# EAGLE board ATTiny Fuse Reset with 12V Charge Pump (EAGLE 7.2.0)
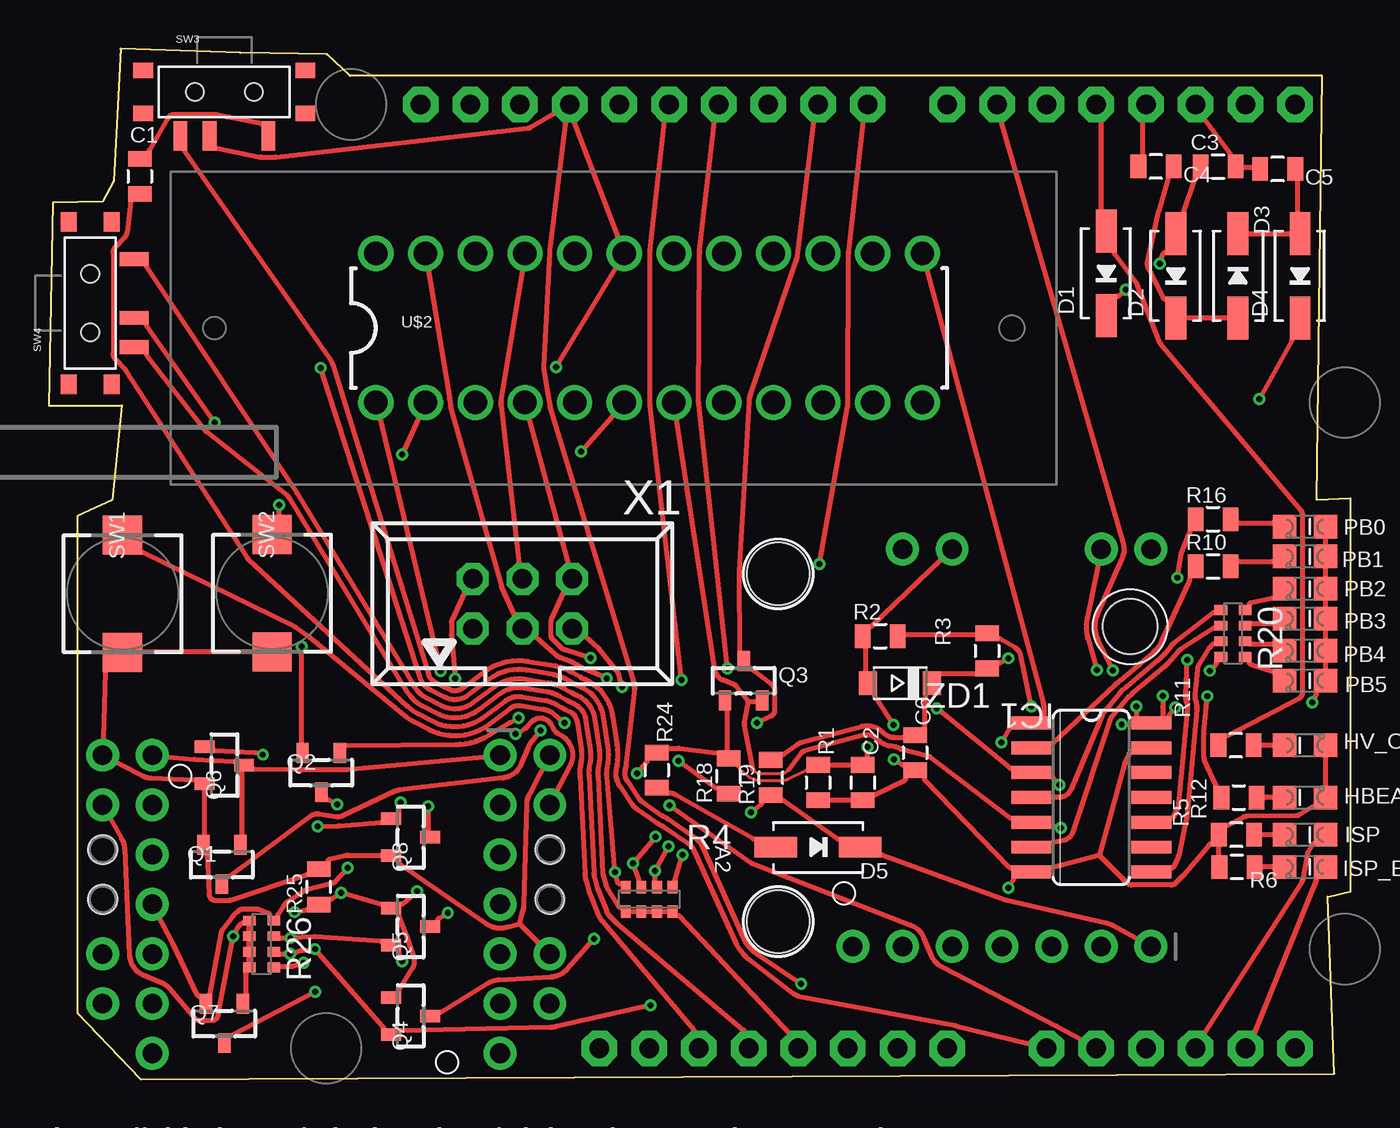
[diagram p0: board, top side]
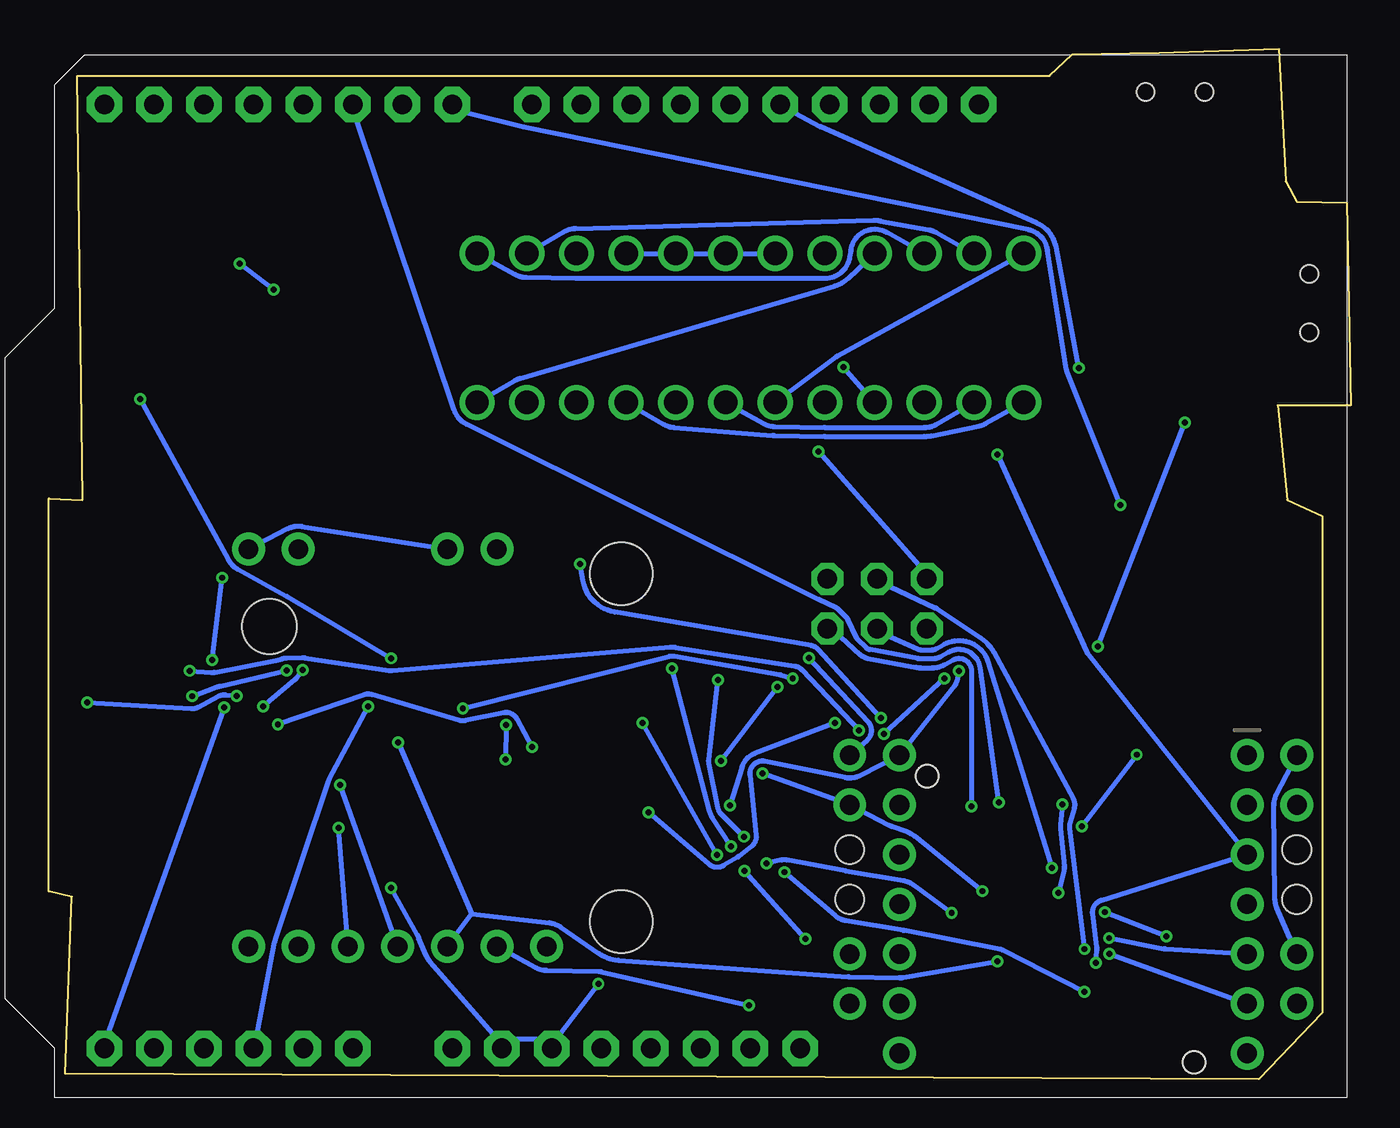
[diagram p1: board, bottom side, seen from below]

Size 66.55 x 52.67 mm. Coordinates in mm from the lower left corner, seen from the top.
Copper layers 1+16: TOP 0.035mm / dielectric 0.15mm / BOTTOM 0.035mm
Design rules "default": minimum track width 6mil, minimum drill 0.6mm, track to track 6mil, track to pad 8mil, pad to pad 8mil, via to via 8mil, smd to smd 8mil, copper to edge 12mil, drill to drill 8mil, minimum pad ring 0.1mm, minimum via ring 0.1mm, stop-mask expansion 4mil, vias tented up to drill 0mil, thermal gap 10mil
Net classes: 0 default: width 0.152 mm, clearance 0.205 mm

## Footprints (pad centres in the part's own frame; a part is rotated, then mirrored left to right if it is on the bottom)
BREAKOUT_TAMI_NOHOLES = drill 1 pad 1.676: 1.PB5 -10.16,-8.89; 2.PB4 -10.16,-6.35; 3.PB3 -10.16,-3.81; 4.PB2 -10.16,-1.27; 5.PB1 -10.16,1.27; 6.PB0 -10.16,3.81; 7.GND -10.16,6.35; 8.GND 10.16,-8.89; 9.VCC 10.16,-6.35; 10.GND 10.16,1.27; 11.BAT 10.16,3.81
BREAKOUT_ATTAMI = drill 1 pad 1.676: 1.PB5 1.27,1.27; 2.PB4 1.27,3.81; 3.PB3 1.27,6.35; 4.PB2 1.27,8.89; 5.PB1 1.27,11.43; 6.PB0 1.27,13.97; 7.GND 1.27,16.51; 8.GND 21.59,1.27; 9.VCC 21.59,3.81; 10.GND 21.59,11.43; 11.BAT 21.59,13.97 | hole 2.8: 17.628,2.337 | hole 3.2: 20.32,20.32; 2.54,20.32
0805 = smd 0.8 x 1.2: 1 -0.9,0; 2 0.9,0
SOD-323 = smd 2.184 x 1.067: AQ 2.159,0; CQ -2.159,0
LED-805 = smd 1.2 x 1.2: A 0,-1.05; C 0,1.05
SO14 = smd 0.66 x 2.032: 1 -3.81,-3.073; 2 -2.54,-3.073; 3 -1.27,-3.073; 4 0,-3.073; 5 1.27,-3.073; 6 2.54,-3.073; 7 3.81,-3.073; 8 3.81,3.073; 9 2.54,3.073; 10 1.27,3.073; 11 0,3.073; 12 -1.27,3.073; 13 -2.54,3.073; 14 -3.81,3.073
1X02_PP_HOLES_ONLY = drill 0.889 pad 1.397: 1 0,0; 2 2.54,0 | hole 1.473: 2.54,0; 0,0
SOT23-R = smd 0.635 x 1.016: 1 -0.95,-1; 2 0.95,-1; 3 0,1
0603-ARV = smd 0.5 x 0.65: 1 -1.2,-0.625; 2 -0.4,-0.625; 3 0.4,-0.625; 4 1.2,-0.625; 5 1.2,0.625; 6 0.4,0.625; 7 -0.4,0.625; 8 -1.2,0.625
PUSHBUTTON_SMD_SJ = smd 2 x 2: P$1 3,0; P$2 -3,0
KPS-1290 = smd 0.7 x 1.5: O -2.25,2.25; P 0.75,2.25; S 2.25,2.25 | smd 1 x 0.8: P$1 -4.15,1.1; P$2 -4.15,-1.1; P$3 4.15,-1.1; P$4 4.15,1.1 | hole 0.9: 1.5,0; -1.5,0
ARDUINOR3-BPLACE = drill 1 pad 1.815 octagon: 3V 35.56,2.54; 5V 38.1,2.54; A0 50.8,2.54; A1 53.34,2.54; A2 55.88,2.54; A3 58.42,2.54; A4 60.96,2.54; A5 63.5,2.54; AREF 23.876,50.8; D0 63.5,50.8; D1 60.96,50.8; D2 58.42,50.8; D3 55.88,50.8; D4 53.34,50.8; D5 50.8,50.8; D6 48.26,50.8; D7 45.72,50.8; D8 41.656,50.8; D9 39.116,50.8; D10 36.576,50.8; D11 34.036,50.8; D12 31.496,50.8; D13 28.956,50.8; GND 26.416,50.8; GND1 43.18,2.54; GND2 40.64,2.54; IOREF 30.48,2.54; RESERVED 27.94,2.54; RESET 33.02,2.54; SCL 18.796,50.8; SDA 21.336,50.8; VIN 45.72,2.54
DIL-24-ZIF = drill 1.2 pad 1.8: P$1 -13.97,-3.81; P$2 -11.43,-3.81; P$3 -8.89,-3.81; P$4 -6.35,-3.81; P$5 -3.81,-3.81; P$6 -1.27,-3.81; P$7 1.27,-3.81; P$8 3.81,-3.81; P$9 6.35,-3.81; P$10 8.89,-3.81; P$11 11.43,-3.81; P$12 13.97,-3.81; P$13 13.97,3.81; P$14 11.43,3.81; P$15 8.89,3.81; P$16 6.35,3.81; P$17 3.81,3.81; P$18 1.27,3.81; P$19 -1.27,3.81; P$20 -3.81,3.81; P$21 -6.35,3.81; P$22 -8.89,3.81; P$23 -11.43,3.81; P$24 -13.97,3.81
057-006-1 = drill 1 pad 1.632 octagon: 1 -2.54,-1.27; 2 -2.54,1.27; 3 0,-1.27; 4 0,1.27; 5 2.54,-1.27; 6 2.54,1.27
SOD-123 = smd 0.91 x 1.22: A 1.635,0; C -1.635,0

## Placement (x,y rotation side)
A1  [BREAKOUT_TAMI_NOHOLES]  12.91,7.67 180 top
A2  [BREAKOUT_ATTAMI]  57.61,5.51 90 top
A3  [BREAKOUT_TAMI_NOHOLES]  15.45,7.67 180 bottom
C1  [0805]  4.65,46.15 270 top
C2  [0805]  41.61,15.16 270 top
C3  [0805]  59.77,46.66 0 top
C4  [0805]  56.6,46.66 180 top
C5  [0805]  62.82,46.53 180 top
C6  [0805]  44.28,16.69 270 top
D1  [SOD-323]  54.06,41.2 90 top
D2  [SOD-323]  57.61,41.07 90 top
D3  [SOD-323]  60.79,41.07 270 top
D4  1N4148  [SOD-323]  63.96,41.07 90 top
D5  [SOD-323]  39.32,11.86 180 top
HBEAT  H.B.  [LED-805]  64.22,14.4 270 top
HV_ON  HV on  [LED-805]  64.22,17.07 270 top
IC1  74HC04D  [SO14]  53.29,14.4 270 top
ISP  pmode  [LED-805]  64.22,12.5 90 top
ISP_ERR  err  [LED-805]  64.22,10.84 90 top
JP1  [1X02_PP_HOLES_ONLY]  25.61,9.19 90 top
JP2  [1X02_PP_HOLES_ONLY]  2.75,9.19 90 top
PB0  PB0  [LED-805]  64.22,28.24 90 top
PB1  PB1  [LED-805]  64.22,26.72 90 top
PB2  PB2  [LED-805]  64.22,25.07 90 top
PB3  PB3  [LED-805]  64.22,23.54 90 top
PB4  PB4  [LED-805]  64.22,21.89 90 top
PB5  PB5 rst  [LED-805]  64.22,20.37 90 top
Q1  BSS138  [SOT23-R]  8.84,10.97 180 top
Q2  PMV65XP  [SOT23-R]  13.92,15.67 180 top
Q3  BSS138  [SOT23-R]  35.51,20.37 0 top
Q4  BSS138  [SOT23-R]  18.5,3.22 270 top
Q5  BSS138  [SOT23-R]  18.5,7.8 270 top
Q6  BSS138  [SOT23-R]  8.97,16.05 270 top
Q7  BSS138  [SOT23-R]  8.97,2.84 180 top
Q8  BSS130  [SOT23-R]  18.5,12.37 270 top
R1  4.7K  [0805]  39.32,15.16 270 top
R2  [0805]  42.5,22.66 0 top
R3  [0805]  47.96,21.89 270 top
R4  4k7  [0603-ARV]  30.69,9.19 180 top
R5  [0805]  60.71,12.5 180 top
R6  [0805]  60.74,10.84 180 top
R10  330R  [0805]  59.52,26.21 0 top
R11  [0805]  60.68,17.07 180 top
R12  [0805]  60.84,14.4 0 top
R16  330R  [0805]  59.52,28.62 0 top
R18  4.7K  [0805]  34.75,15.49 90 top
R19  [0805]  36.91,15.42 90 top
R20  330R  [0603-ARV]  60.53,22.78 90 top
R24  [0805]  31.07,15.8 270 top
R25  1k  [0805]  13.8,9.83 90 top
R26  4k7  [0603-ARV]  10.88,6.91 90 top
SW1  [PUSHBUTTON_SMD_SJ]  3.76,24.81 270 top
SW2  [PUSHBUTTON_SMD_SJ]  11.41,24.84 270 top
SW3  SWITCH_SPDT  [KPS-1290]  8.97,50.47 180 top
SW4  SWITCH_SPDT  [KPS-1290]  2.11,39.67 270 top
U1  [ARDUINOR3-BPLACE]  0.21,-0.97 0 top
U$2  ZIFSOCKET-24  [DIL-24-ZIF]  30.69,38.4 0 top
X1  [057-006-1]  24.21,24.31 0 top
ZD1  [SOD-123]  43.51,20.24 180 top

## Library data of the parts
A1-A3 C1-C6 D1-D5 HBEAT HV_ON ISP ISP_ERR PB0 PB1-PB5 R1-R3 R5 R6 R10-R12 R16 R18 R19 R24 R25 U1 = ATtami
IC1 = 74xx-eu
JP1 JP2 = SparkFun-Connectors
Q1-Q8 SW1 SW2 = microbuilder
R4 R20 R26 = SparkFun-Passives
SW3 SW4 = SparkFun-Electromechanical
U$2 = ATTiny Fuse Reset with 12V Charge Pump
X1 = con-panduit; OC_FARNELL: unknown; OC_NEWARK: unknown
ZD1 = dp_devices

## Nets
11.5V: C6.1 D4.CQ R3.2 R19.2 ZD1.C
ATTINY_VCC: A1.9.VCC A2.9.VCC A3.9.VCC C2.1 IC1.14 PB0.A PB1.A PB2.A PB3.A PB4.A PB5.A Q2.3 Q3.1 Q4.1 Q5.1 Q7.1 R1.1 R18.2 R24.1 R25.1 R26.5 R26.6 R26.7 R26.8 U1.A5 U$2.P$6 U$2.P$24 X1.2
GND: A1.8.GND A1.10.GND A2.8.GND A2.10.GND A3.8.GND A3.10.GND C2.2 C6.2 HBEAT.C HV_ON.C IC1.7 IC1.13 Q1.2 Q6.2 Q8.2 R1.2 R2.1 R5.2 R6.2 R25.2 SW1.P$1 SW2.P$1 SW3.P U1.GND U1.GND1 U1.GND2 U$2.P$4 U$2.P$16 U$2.P$17 U$2.P$18 U$2.P$19 X1.6 ZD1.A
HV/RESET: A1.1.PB5 A2.1.PB5 A3.1.PB5 D5.CQ Q1.1 Q6.3 R19.1 U$2.P$1 U$2.P$9
HV_OFF(RESET): Q6.1 Q8.1 U1.D5
HV_SENSE: R2.2 R3.1 U1.A2
ISP_RESET: Q8.3 R18.1 X1.5
N$1: Q2.2 SW4.P
N$2: Q3.3 R4.1 U1.D9
N$3: SW3.S U1.A0
N$4: HV_ON.A R11.1
N$5: D5.AQ R24.2
N$6: ISP.C R5.1
N$7: A1.2.PB4
N$8: Q4.3 R4.2 U1.D11
N$9: SW1.P$2 U1.A1
N$10: C3.1 D1.CQ D2.AQ
N$11: C4.1 D2.CQ D3.AQ
N$12: C5.1 D3.CQ D4.AQ
N$13: IC1.10 R16.1
N$14: C1.1 SW3.O
N$15: ISP_ERR.C R6.1
N$16: SW4.S U1.3V
N$17: ISP_ERR.A U1.A4
N$18: ISP.A U1.A3
N$19: R12.1 U1.D6
N$20: HBEAT.A R12.2
N$21: IC1.2 R10.1
N$22: SW2.P$2 U1.D7
N$23: PB2.C R20.4
N$24: IC1.4 R20.5
N$25: PB1.C R10.2
N$26: IC1.6 R20.6
N$27: PB0.C R16.2
N$28: IC1.8 R20.7
N$29: PB3.C R20.3
N$30: PB4.C R20.2
N$31: PB5.C R20.1
N$32: Q1.3 R20.8
N$33: C1.2 U1.RESET
N$34: Q7.3 R4.4 U1.D13
N$36: X1.1
N$37: Q5.3 R4.3 U1.D12
P1: C3.2 C5.2 U1.D2
P2: C4.2 U1.D3
PUMP_VCC: D1.AQ R11.2 U1.D4
SCI: A2.3.PB3 A3.3.PB3 IC1.5 Q3.2 R26.1 U$2.P$2 U$2.P$7
SDI_MOSI: A2.6.PB0 A3.6.PB0 Q4.2 R26.2 U$2.P$12 U$2.P$21 X1.4
SDO-SCK: A2.4.PB2 A3.4.PB2 IC1.3 Q7.2 R26.4 U$2.P$14 U$2.P$23 X1.3
SII-MISO: A2.5.PB1 A3.5.PB1 IC1.1 Q5.2 R26.3 U$2.P$13 U$2.P$22
VCC: R4.5 R4.6 R4.7 R4.8 SW4.O U1.5V
VCC_OFF: Q2.1 U1.D8
VIN: U1.VIN

## Tracks (layer width: path | path; a pad name or v marks a point on that pad's centre or on a via)
11.5V  (via drill 0.3 pad 0.61)
  TOP 0.254: v49.06,21.52 48.62,21.28 arc-28 48.56,21.27 48.43,21.27 R3.2 47.49,20.72 47.36,20.72 45.6,20.72 45.48,20.72 ZD1.C 44.82,19.76 44.82,19.63 arc-7 44.82,19.62 44.75,19.03 arc6 44.75,18.95 44.75,17.99 44.75,17.86 C6.1 43.8,17.47 43.68,17.47 43.18,17.47 arc-41 42.76,17.63 42.56,17.8 arc56 41.56,18.03 38.52,17.23 arc21 38.26,17.1 37.59,16.61 arc-36 37.51,16.59 37.38,16.59 R19.2 | D4.CQ 63.56,37.95 63.56,37.82 arc-29 63.54,37.76 v61.89,34.77
  BOTTOM 0.254: v61.89,34.77 57.37,26.54 arc-32 56.91,26.08 54.41,24.7 arc2 54.36,24.67 v49.06,21.52
ATTINY_VCC  (via drill 0.3 pad 0.61)
  TOP 0.152: R18.2 35.22,16.07 35.22,15.99 arc48 35.27,15.9 35.73,15.49 arc20 35.85,15.41 36.07,15.32 arc22 36.31,15.28 37.51,15.28 arc26 37.79,15.34 38.67,15.78 arc-26 38.72,15.79 38.8,15.79 R1.1
  TOP 0.254: v55.6,19.05 55.6,18.54 55.6,18.41 IC1.14 | IC1.14 57.26,18.41 57.26,18.54 arc-38 57.28,18.62 v57.59,19.01 | U$2.P$6 v27.2,32.07 | Q3.1 34.66,18.99 34.66,18.86 34.66,16.79 34.66,16.67 R18.2 34.28,16.67 34.15,16.67 arc-7 34.14,16.67 32.26,16.9 arc7 32.18,16.91 31.67,16.91 31.54,16.91 R24.1 30.6,16.42 30.6,16.3 arc-40 30.57,16.22 v30.08,15.62 | v56.95,19.6 56.95,19.01 56.95,18.54 56.95,18.41 IC1.14 | R1.1 39.8,16.06 39.92,16.06 41.01,16.06 41.14,16.06 C2.1 41.84,16.34 41.84,16.46 v41.84,16.97 | v54.84,18.13 55.35,18.13 55.48,18.13 IC1.14 | v64.59,19.26 64.78,19.72 arc22 64.79,19.77 64.79,19.9 PB5.A 65.27,20.84 65.27,20.97 65.27,21.29 65.27,21.42 PB4.A 65.27,22.37 65.27,22.49 65.27,22.94 65.27,23.07 PB3.A 65.27,24.02 65.27,24.14 65.27,24.47 65.27,24.6 PB2.A 65.27,25.54 65.27,25.67 65.27,26.12 65.27,26.25 PB1.A 65.27,27.19 65.27,27.32 65.27,27.64 65.27,27.77 PB0.A | v12.56,8.54 13.17,8.65 arc-11 13.2,8.66 13.32,8.66 R25.1 14.27,9.2 14.4,9.2 arc33 14.46,9.22 v14.94,9.53 16.95,8.94 arc16 16.99,8.94 17.11,8.94 Q5.1 | Q5.1 17.88,8.94 18,8.94 arc41 18.09,8.97 v18.82,9.61 | A1.9.VCC 3.72,12.28 arc-27 3.86,11.79 4.12,6.34 arc65 4.83,5.32 5.74,4.94 arc-27 6.18,4.62 7.45,3.12 arc50 7.7,3 8.34,3 arc79 8.66,3.27 v9.42,7.29 9.63,7.71 arc-16 9.68,7.79 9.83,7.94 arc-47 9.93,7.98 10.05,7.98 R26.5 10.25,7.98 10.25,7.86 10.25,7.56 10.25,7.43 R26.6 10.25,7.18 10.25,7.06 10.25,6.76 10.25,6.63 R26.7 10.25,6.38 10.25,6.26 10.25,5.96 10.25,5.83 R26.8 10.09,5.58 10.09,5.46 10.09,4.35 10.09,4.22 Q7.1 | A2.9.VCC 53.08,23.59 arc27 53.12,22.54 v53.57,20.91
  TOP 0.254: Q2.3 14.11,14.29 14.24,14.29 arc-28 14.3,14.27 v14.74,14.04 | Q4.1 17.88,4.37 17.88,4.49 arc-32 17.9,4.56 18.59,5.69 arc50 18.66,6.22 18.32,7.27 arc3 18.31,7.28 17.89,8.38 arc-21 17.88,8.43 17.88,8.56 Q5.1 | v23.85,17.66 24.31,17.91 arc22 24.5,18.06 24.63,18.22 arc-113 25.69,18.11 25.8,17.91 arc34 26.06,17.65 26.16,17.59 arc-89 26.65,16.02 A3.9.VCC | X1.2 21.36,25 21.27,24.91 arc21 21.24,24.87 20.61,23.49 arc24 20.58,23.35 20.58,22.72 arc4 20.59,22.7 v20.76,20.49
  BOTTOM 0.254: v53.57,20.91 53.9,20.5 arc12 53.98,20.4 v55.6,19.05 | v64.59,19.26 59.26,18.94 arc-32 58.92,19.01 57.89,19.57 arc33 57.54,19.64 v56.95,19.6 | U$2.P$24 18.66,41.14 18.66,41.13 26.23,36.97 arc-8 26.31,36.92 U$2.P$6 | v27.2,32.07 22.08,26.25 22.07,26.24 21.98,26.15 X1.2 | v20.76,20.49 v23.85,17.66 | v57.59,19.01 63.48,2.45 arc-20 63.49,2.41 63.49,2.28 U1.A5 | v14.74,14.04 14.83,13.01 arc-10 14.83,12.81 14.64,10.86 arc19 14.66,10.65 v14.94,9.53 | v9.42,7.29 v12.56,8.54 | v18.82,9.61 22.3,12.43 arc-19 22.65,12.63 23.46,12.92 arc8 23.61,12.98 A3.9.VCC v30.08,15.62 | v41.84,16.97 42.62,18.41 arc-73 43.31,18.73 45.26,18.33 arc28 45.57,18.34 50.05,19.66 arc-35 50.43,19.65 v54.84,18.13
GND  (via drill 0.3 pad 0.61)
  TOP 0.254: v43.19,16.35 43.61,16.08 arc33 43.68,16.06 43.8,16.06 C6.2 | v43.18,18.11 42.23,19.56 arc-33 42.21,19.63 42.21,19.76 ZD1.A 41.74,20.73 41.74,20.85 41.74,22.06 41.74,22.18 R2.1 41.87,23.13 42,23.13 arc44 42.09,23.16 A2.10.GND | R1.2 39.8,14.26 39.92,14.26 41.01,14.26 41.14,14.26 C2.2 42.08,14.54 42.21,14.54 arc26 42.27,14.55 43.73,15.27 arc64 43.8,15.39 43.8,15.51 C6.2 | U$2.P$4 26.56,26.36 arc-15 26.57,26.33 26.57,26.2 X1.6 26.44,25 26.35,24.91 25.69,23.49 arc25 25.66,23.35 25.66,22.72 arc45 25.76,22.49 25.85,22.4 | SW3.P 8.44,47.6 8.57,47.6 arc-12 8.6,47.59 10.8,47.14 arc12 10.87,47.14 11.57,47.14 arc7 11.61,47.14 24.47,48.62 arc24 24.62,48.67 25.85,49.38 arc15 25.88,49.4 25.96,49.49 U1.GND | v25.93,36.41 U$2.P$19 26.85,48.95 arc-21 26.84,49 26.84,49.12 U1.GND | SW2.P$1 10.54,21.83 10.41,21.83 4.76,21.83 4.64,21.83 SW1.P$1 2.89,20.94 2.89,20.81 A1.8.GND 4.75,15.52 arc25 5.24,15.39 7.46,15.29 7.59,15.29 Q6.2 7.93,14.91 7.93,14.78 7.93,12.48 7.93,12.35 Q1.2 8.08,11.59 8.08,11.46 8.19,9.45 arc87 8.53,9.13 9.16,9.13 arc18 9.27,9.15 13.16,10.45 arc-19 13.2,10.46 13.32,10.46 R25.2 14.27,11 14.27,11.13 arc-77 14.37,11.25 15.14,11.43 arc-13 15.28,11.44 16.99,11.44 17.11,11.44 Q8.2 17.88,11.23 17.88,11.1 arc55 17.93,11 19.18,10.14 | IC1.7 49.33,10.79 49.2,10.79 arc-46 49.11,10.83 44.79,15.3 arc-44 44.75,15.39 44.75,15.51 C6.2 | 19.18,10.14 | 19.18,10.14 22.38,7.94 arc50 23.38,7.76 24.06,7.94 | 24.06,7.94 24.25,8.62 arc13 24.29,8.9 24.44,14.05 arc-26 24.57,14.56 A3.8.GND | v27.68,21.54 26.34,21.97 arc-27 26.2,22.05 26.11,22.14
  TOP 0.254: 26.11,22.14 | 26.11,22.14 25.85,22.4 | 25.85,22.4 | U1.GND 26.4,49.12 26.4,49 arc-7 26.4,48.98 25.61,42.37 arc4 25.6,42.28 25.29,36.44 arc13 25.3,36.3 25.55,34.8 arc-1 25.56,34.77 25.61,34.41 arc9 25.65,34.22 29.91,20.23 arc-23 29.93,19.98 29.51,16.13 arc-5 29.45,15.76 29.45,15.75 arc46 29.55,15.27 30.19,14.31 arc21 30.28,14.23 31.35,13.47 arc8 31.43,13.42 31.53,13.37 arc-7 31.64,13.3 33,12.37 arc-31 33.38,11.91 35.48,7.24 arc32 36.18,6.41 v38.46,4.87 | v49.06,9.77 49.31,10.19 arc31 49.33,10.26 49.33,10.39 IC1.7 | HV_ON.C 65.27,16.59 65.27,16.47 65.27,15 65.27,14.87 HBEAT.C 64.79,13.93 64.67,13.93 arc31 64.6,13.91 63.94,13.51 arc-30 63.77,13.47 61.21,13.43 arc26 61.06,13.39 60.27,12.98 arc-27 60.21,12.97 60.08,12.97 R5.2 | R6.2 59.82,11.32 59.82,11.44 59.82,11.9 59.82,12.02 R5.2 | R5.2 59.54,12.02 59.41,12.02 arc50 59.31,11.98 57.99,10.41 arc-4 57.95,10.37 57.62,10.03 arc-46 57.38,9.93 55.35,9.93 arc-45 55.11,10.03 53.71,11.45 | 53.71,11.45 51.27,10.8 arc-15 51.24,10.79 51.11,10.79 IC1.7 | A3.10.GND 24.06,7.94 | IC1.13 55.48,16.74 55.35,16.74 arc65 55.24,16.66 55,16.16 arc9 54.98,16.1 53.71,11.45
  BOTTOM 0.254: A2.8.GND 54.34,28.14 arc36 53.62,28.26 A2.10.GND | v43.18,18.11 v43.19,16.35 | A1.10.GND 3.77,8.75 arc23 3.87,9.18 3.92,14.01 arc28 3.79,14.56 A1.8.GND | A3.8.GND 24.71,17.34 arc-92 24.66,18.25 v27.68,21.54 | U$2.P$4 v25.93,36.41 | U$2.P$16 U$2.P$17 U$2.P$18 U$2.P$19 | v38.46,4.87 40.4,2.33 arc8 40.41,2.32 40.5,2.23 U1.GND2 41.51,1.92 41.6,2.01 arc-45 41.69,2.05 42.55,2.05 arc-45 42.64,2.01 42.73,1.92 U1.GND1 43.73,2.23 43.82,2.32 43.83,2.33 47.06,6.01 arc18 47.26,6.33 47.64,7.23 arc-6 47.7,7.35 v49.06,9.77
HV/RESET  (via drill 0.3 pad 0.61)
  TOP 0.254: Q6.3 10.35,15.86 10.48,15.86 12.65,15.83 12.66,15.83 15.19,15.83 arc5 15.22,15.83 A1.1.PB5 | v35.9,13.64 36.39,14.02 arc52 36.44,14.12 36.44,14.24 R19.1 37.38,14.24 37.51,14.24 arc-35 37.58,14.22 40.32,12.29 arc35 40.39,12.27 40.52,12.27 D5.CQ 42.45,11.45 42.57,11.45 arc-20 42.62,11.45 48.84,9.17 arc7 48.91,9.15 54.07,7.97 arc-16 54.39,7.85 A2.1.PB5 | U$2.P$1 v20.02,20.87 | A3.1.PB5 7.43,16.35 arc2 7.44,16.35 9.46,16.24 9.59,16.24 Q6.3 | Q1.1 9.88,12.35 9.88,12.48 9.88,15.73 9.88,15.86 Q6.3
  BOTTOM 0.254: U$2.P$9 35.14,33.49 arc-26 34.6,33.32 29.55,32.91 arc-4 29.45,32.9 26.91,32.85 arc-1 26.88,32.85 21.8,32.85 arc-12 21.45,32.89 19.01,33.39 arc-17 18.66,33.52 U$2.P$1 | v20.02,20.87 20.13,20.36 arc26 20.26,20.1 A1.1.PB5 25.07,15.52 arc39 25.84,15.41 29.95,16.25 arc-107 30.71,15.56 30.39,12.46 arc58 30.63,11.89 31.27,11.39 arc7 31.34,11.35 32.06,10.92 arc71 32.8,10.98 v35.9,13.64
HV_OFF(RESET)  (via drill 0.3 pad 0.61)
  TOP 0.254: v17.99,14.15 17.88,13.66 arc13 17.88,13.64 17.88,13.51 Q8.1 17.11,13.13 16.99,13.13 arc5 16.98,13.13 14.83,12.95 arc-3 14.77,12.95 v13.73,12.92 | Q6.1 8.35,16.81 8.48,16.81 8.49,16.81 10.5,16.7 arc-12 10.57,16.69 v10.94,16.59
  BOTTOM 0.254: v17.99,14.15 18.93,21.02 arc-112 20.56,21.82 20.97,21.59 arc28 21.34,21.49 21.37,21.49 arc1 21.38,21.49 21.98,21.49 arc10 22.13,21.5 24.58,21.96 arc35 24.76,22.05 25.2,22.49 arc20 25.27,22.58 25.7,23.49 arc-20 25.76,23.58 26.2,24.03 arc-20 26.3,24.09 27.21,24.52 45.21,33.49 arc45 45.83,34.2 50.78,48.95 arc19 50.79,49 50.79,49.12 U1.D5 | v10.94,16.59 v13.73,12.92
HV_SENSE  (via drill 0.3 pad 0.61)
  TOP 0.254: v50.23,19.05 49.69,21.65 arc49 49.38,22.07 48.62,22.5 arc30 48.56,22.52 48.43,22.52 R3.1 47.49,22.72 47.36,22.72 43.8,22.72 43.67,22.72 R2.2
  BOTTOM 0.254: U1.A2 55.87,2.28 55.87,2.41 arc11 55.87,2.44 55,7.01 arc8 54.96,7.17 52.26,15.25 arc10 52.22,15.34 v50.23,19.05
ISP_RESET  (via drill 0.3 pad 0.61)
  TOP 0.254: v29.3,20.05 29.14,20.65 arc24 29.02,20.89 28.18,21.93 arc9 28.11,22.01 27.42,22.63 27.41,22.63 27.32,22.72 X1.5 | R18.1 34.28,14.87 34.15,14.87 arc-36 34.08,14.89 v32.18,16.27 | v19.4,13.95 19.4,12.69 19.4,12.56 Q8.3
  BOTTOM 0.254: v32.18,16.27 v29.3,20.05 | X1.5 26.18,22.72 26.09,22.63 26.08,22.63 25.06,21.7 arc-32 24.67,21.5 22.21,21.05 arc-10 21.98,21.03 21.38,21.03 arc-2 21.33,21.03 21.31,21.03 arc-27 20.74,21.19 20.33,21.43 arc120 19.38,20.87 v19.4,13.95
N$1  (via drill 0.3 pad 0.61)
  TOP 0.254: Q2.2 12.92,17.05 12.92,17.18 v12.92,22.12 | v8.48,33.57 5.01,38.5 arc-35 4.99,38.57 4.99,38.7 SW4.P
  BOTTOM 0.254: v12.92,22.12 v8.48,33.57
N$2  (via drill 0.3 pad 0.61)
  TOP 0.254: R4.1 32.01,10.02 32.01,10.14 arc-16 32.02,10.18 v32.38,11.46 | 35.32,21.88 35.32,21.75 Q3.3 35.7,20.99 35.83,20.99 arc-37 35.91,20.96 36.98,20.14 arc-53 37.11,19.88 37.11,18.86 arc-65 36.92,18.56 v36.2,18.22 | 35.32,21.88 | 35.32,21.88 35.31,25.82 arc-3 35.31,25.94 35.81,34.66 arc-16 35.87,34.99 38.2,41.81 arc12 38.26,42.06 39.1,48.98 arc7 39.1,49 39.1,49.12 U1.D9
  BOTTOM 0.254: v32.38,11.46 v36.2,18.22
N$3
  TOP 0.254: SW3.S 6.94,47.6 6.94,47.47 arc35 6.97,47.4 14.42,36.73 arc-18 14.5,36.55 19.41,20.68 arc46 19.73,20.3 20.47,19.93 arc64 21.14,19.98 22.25,20.82 arc-46 24.48,21.36 25.67,21.17 arc-20 26.79,20.78 27.14,20.58 arc4 27.21,20.55 27.44,20.44 arc-56 28.81,18.58 29.04,17.08 arc-20 29,15.86 29,15.85 arc46 29.17,15.01 29.81,14.05 arc21 30.01,13.85 31.09,13.09 arc8 31.21,13.01 31.32,12.96 arc-7 31.38,12.92 32.74,11.99 arc-31 32.96,11.73 35.07,7.05 arc28 35.8,6.12 38.07,4.37 arc27 38.34,4.24 46.34,2.74 arc-3 46.35,2.73 50.14,1.8 arc14 50.17,1.79 50.3,1.79 U1.A0
N$4
  TOP 0.254: HV_ON.A 62.69,17.07 62.57,17.07 61.98,17.07 61.86,17.07 R11.1
N$5
  TOP 0.254: D5.AQ 36.2,12.27 36.07,12.27 arc-30 36.01,12.28 32.04,14.54 arc30 31.71,14.62 31.67,14.62 31.54,14.62 R24.2
N$6
  TOP 0.254: ISP.C 62.69,12.5 62.57,12.5 62.01,12.5 61.88,12.5 R5.1
N$8  (via drill 0.3 pad 0.61)
  TOP 0.254: R4.2 30.98,10.02 30.98,10.14 v30.98,10.65 v31.67,11.89 | Q4.3 19.88,3.41 20,3.41 arc32 20.07,3.43 22.42,4.9 arc-29 23,5.08 25.67,5.23 arc45 26.48,5.62 v27.88,7.17 | v34.69,21 33.22,34.46 arc-7 33.22,34.6 33.26,42.22 arc-6 33.27,42.35 34.02,48.98 arc6 34.02,49 34.02,49.12 U1.D11
  BOTTOM 0.254: v27.88,7.17 v30.98,10.65 | v31.67,11.89 32.64,13.39 arc18 32.78,13.71 v34.69,21
N$9  (via drill 0.3 pad 0.61)
  TOP 0.254: v31.72,13.99 35.88,11.06 arc14 35.95,11.02 44.06,7.87 arc-46 44.72,7.23 45.1,6.33 arc40 45.64,5.74 51.51,2.71 51.51,2.7 52.77,2.03 arc-17 52.8,2.01 52.89,1.92 U1.A1 | SW1.P$2 4.64,26.94 4.76,26.94 arc-26 4.82,26.93 12.56,23.14 arc-9 12.6,23.11 13.28,22.64 arc-5 13.33,22.61 18.15,18.61 arc13 18.69,18.26 19.42,17.88 arc64 22.51,18.14 23.63,18.98 arc-46 24.11,19.1 25.3,18.9 arc-31 25.84,18.65 v26.36,18.21
  BOTTOM 0.254: v26.36,18.21 30.46,16.65 arc-52 31.12,15.94 v31.72,13.99
N$10  (via drill 0.3 pad 0.61)
  TOP 0.254: v56.8,41.7 56.96,42.18 arc-71 57.08,42.26 57.21,42.26 D2.AQ 58.02,44.19 58.02,44.32 arc-19 58.02,44.36 58.59,46.02 arc19 58.6,46.06 58.6,46.19 C3.1 | D1.CQ 54.46,40 54.59,40 arc40 54.67,40.03 v55.06,40.36
  BOTTOM 0.254: v55.06,40.36 v56.8,41.7
N$11
  TOP 0.254: D3.AQ 60.38,38.91 60.25,38.91 58.14,38.91 58.02,38.91 D2.CQ 57.21,39.88 57.08,39.88 arc-63 56.96,39.95 56.23,41.41 arc-40 56.17,41.84 56.75,44.4 arc-3 56.76,44.41 57.22,46.02 arc16 57.22,46.06 57.22,46.19 C4.1
N$12
  TOP 0.254: D3.CQ 61.19,43.23 61.32,43.23 63.43,43.23 63.56,43.23 D4.AQ 63.84,44.19 63.84,44.32 63.84,45.93 63.84,46.06 C5.1
N$13  (via drill 0.3 pad 0.61)
  TOP 0.254: v57.69,25.63 57.89,26.86 arc-13 57.91,26.94 58.33,27.98 arc22 58.34,28.02 58.34,28.15 R16.1 | IC1.10 57.26,13.33 57.38,13.33 arc65 57.5,13.41 57.73,13.91 arc19 57.76,14.03 58.22,18.95 arc23 58.19,19.21 58.18,19.24 arc-20 58.13,19.62 v58.2,21.43
  BOTTOM 0.254: v58.2,21.43 v57.69,25.63
N$14
  TOP 0.254: SW3.O 11,48.84 10.87,48.84 arc-12 10.85,48.84 8.64,49.29 arc12 8.57,49.3 6.37,49.3 arc60 6.08,49.14 5.14,47.51 arc30 5.13,47.45 5.13,47.32 C1.1
N$15
  TOP 0.254: ISP_ERR.C 62.69,10.84 62.57,10.84 62.04,10.84 61.91,10.84 R6.1
N$16
  TOP 0.254: SW4.S 4.99,37.2 4.99,37.07 arc38 5.01,37 7.98,33.18 arc14 8.09,33.07 12.17,29.85 arc-20 12.32,29.68 18.3,19.83 arc32 19.1,19.08 19.84,18.7 arc64 21.96,18.88 23.08,19.71 arc-46 24.26,20 25.45,19.81 arc-20 26.12,19.58 26.47,19.38 arc4 26.61,19.31 26.84,19.2 arc-56 27.45,18.37 27.67,16.87 arc-20 27.65,16.14 27.65,16.12 arc15 27.6,15.5 27.86,10.53 arc13 27.9,10.28 28.03,9.8 arc6 28.07,9.68 28.5,8.6 arc23 28.68,8.33 29,8.01 arc5 29.02,7.99 35.49,2.52 arc-5 35.51,2.5 arc-45 35.55,2.41 35.55,2.28 U1.3V
N$17
  TOP 0.254: ISP_ERR.A 64.79,10.37 64.79,10.24 arc-22 64.78,10.2 61.63,2.36 arc-23 61.6,2.32 61.51,2.23 U1.A4
N$18
  TOP 0.254: ISP.A 64.79,12.02 64.67,12.02 arc63 64.55,11.95 64.37,11.6 arc17 64.34,11.51 64.09,10.18 arc-22 64.05,10.06 59.08,2.34 arc-12 59.06,2.32 58.97,2.23 U1.A3
N$19  (via drill 0.3 pad 0.61)
  TOP 0.254: R12.1 59.66,14.87 59.66,15 arc24 59.65,15.05 59.08,16.33 arc-24 59.05,16.47 59.05,17.67 arc-5 59.05,17.7 v59.22,19.58 | v54.39,20.89 53.68,22.35 arc-50 53.65,23.86 54.87,26.63 arc40 54.93,27.43 48.69,48.96 arc-16 48.69,49 48.69,49.12 U1.D6
  BOTTOM 0.254: v59.22,19.58 57.96,20.04 arc7 57.84,20.08 v54.39,20.89
N$20
  TOP 0.254: HBEAT.A 62.69,14.4 62.57,14.4 62.14,14.4 62.01,14.4 R12.2
N$21
  TOP 0.254: IC1.2 51.11,17.14 51.24,17.14 arc43 51.32,17.18 54.53,20.19 arc-6 54.66,20.3 54.78,20.38 arc3 54.81,20.41 56.43,21.78 arc25 56.89,22.39 58.27,25.36 arc10 58.31,25.47 58.34,25.58 arc15 58.34,25.61 58.34,25.74 R10.1
N$22  (via drill 0.3 pad 0.61)
  TOP 0.254: SW2.P$2 11.78,28.71 11.78,28.84 v11.78,29.35
  BOTTOM 0.254: v11.78,29.35 14.49,36.13 arc13 14.52,36.26 15.5,42.41 arc-69 16.47,43.42 42.28,48.67 arc3 42.29,48.67 45.18,49.4 45.27,49.49 U1.D7
N$23
  TOP 0.254: R20.4 61.36,24.11 61.36,24.23 arc-78 61.46,24.36 62.54,24.59 arc-12 62.57,24.6 62.69,24.6 PB2.C
N$24
  TOP 0.254: R20.5 59.71,23.86 59.58,23.86 arc38 59.5,23.83 57.52,22.29 arc12 57.36,22.13 56.99,21.7 arc-10 56.72,21.43 55.1,20.06 arc-3 55.05,20.01 54.94,19.93 arc14 54.75,19.75 53.99,18.83 arc17 53.83,18.56 52.24,14.8 arc-67 51.65,14.41 51.24,14.41 51.11,14.41 IC1.4
N$25
  TOP 0.254: R10.2 60.69,26.47 60.82,26.47 62.57,26.47 62.69,26.47 PB1.C
N$26
  TOP 0.254: R20.6 59.71,23.06 59.58,23.06 arc33 59.51,23.04 57.85,21.96 arc17 57.71,21.84 57.34,21.4 arc-10 57.02,21.08 55.4,19.71 arc-3 55.33,19.65 55.21,19.56 arc14 55.1,19.46 54.35,18.54 arc21 54.24,18.33 52.35,12.63 arc-59 51.89,12.21 51.26,12.07 arc-13 51.24,12.06 51.11,12.06 IC1.6
N$27
  TOP 0.254: R16.2 60.69,28.43 60.82,28.43 62.57,28.43 62.69,28.43 PB0.C
N$28
  TOP 0.254: R20.7 59.71,22.26 59.58,22.26 arc47 59.49,22.22 59.34,22.06 arc11 59.3,22.01 58.81,21.21 arc26 58.72,20.94 58.59,19.64 arc24 58.62,19.38 58.63,19.35 arc-23 58.68,18.91 58.17,13.39 arc-7 58.16,13.29 57.76,11.45 arc-12 57.73,11.37 57.5,10.87 arc-65 57.38,10.79 57.26,10.79 IC1.8
N$29
  TOP 0.254: R20.3 61.36,23.31 61.48,23.31 62.57,23.31 62.69,23.31 PB3.C
N$30
  TOP 0.254: R20.2 61.36,22.26 61.48,22.26 62.57,22.26 62.69,22.26 PB4.C
N$31
  TOP 0.254: R20.1 61.36,21.46 61.36,21.33 arc72 61.44,21.21 62.57,20.84 62.69,20.84 PB5.C
N$32  (via drill 0.3 pad 0.61)
  TOP 0.254: v25.13,17.82 24.7,17.3 arc17 24.53,17.01 24.15,16.11 arc-61 23.2,15.4 17.92,14.78 arc18 17.72,14.72 15.01,13.46 arc-34 14.64,13.41 13.84,13.54 arc46 13.35,13.43 9.24,10.38 arc-37 9.16,10.35 9.03,10.35 Q1.3 | R20.8 59.71,21.46 59.71,21.33 arc-42 59.68,21.25 v59.35,20.88
  BOTTOM 0.254: v59.35,20.88 58.25,20.79 arc-15 58.08,20.8 54.94,21.4 arc-10 54.63,21.48 54.62,21.49 arc20 54.41,21.53 53.58,21.55 arc10 53.47,21.54 49.16,20.89 arc-13 49.01,20.88 34.78,22.09 arc14 34.51,22.08 28.42,21.12 arc38 28.06,20.93 25.9,18.64 v25.13,17.82
N$33
  TOP 0.254: C1.2 4.18,44.98 4.18,44.85 3.99,43.28 arc-36 3.89,43.06 3.37,42.5 arc43 3.28,42.27 3.28,37.07 arc43 3.37,36.85 3.89,36.28 arc-10 3.93,36.23 10.13,26.66 arc14 10.18,26.6 18.34,19.05 arc16 18.9,18.67 19.63,18.29 arc64 22.24,18.51 23.35,19.34 arc-46 24.18,19.55 25.38,19.36 arc-20 25.89,19.18 26.24,18.98 arc4 26.41,18.89 26.64,18.78 arc-56 26.99,18.3 27.22,16.8 arc-20 27.2,16.23 27.2,16.22 arc15 27.14,15.47 27.4,10.5 arc13 27.46,10.16 27.59,9.68 arc6 27.65,9.51 28.07,8.43 arc18 28.28,8.09 32.98,2.49 arc-40 33.01,2.41 33.01,2.28 U1.RESET
N$34  (via drill 0.3 pad 0.61)
  TOP 0.254: R4.4 29.36,9.96 29.24,9.96 arc-77 29.06,10.1 v28.95,10.58 28.52,15.49 arc-17 28.55,15.94 28.55,15.95 arc20 28.58,17.01 28.35,18.51 arc56 27.24,20.02 27.01,20.13 arc-4 26.92,20.18 26.57,20.38 arc20 25.6,20.72 24.4,20.91 arc46 22.53,20.45 21.41,19.62 arc-64 20.26,19.52 19.52,19.89 arc-45 18.98,20.54 v13.9,36.36 | Q7.3 9.16,2.22 9.29,2.22 arc27 9.35,2.24 v13.61,4.46
  BOTTOM 0.254: v13.61,4.46 17.76,6.59 arc-16 17.93,6.65 22.84,7.6 arc-1 22.87,7.6 25.79,8.09 arc31 26.33,8.34 v28.95,10.58 | v13.9,36.36 15.05,42.53 arc-55 16.03,43.76 27.11,48.69 arc4 27.13,48.7 28.42,49.4 28.5,49.49 U1.D13
N$37  (via drill 0.3 pad 0.61)
  TOP 0.254: Q5.3 19.88,7.99 19.88,8.11 arc-60 19.94,8.22 v20.4,8.49 | R4.3 30.16,10.02 30.16,10.14 arc20 30.16,10.19 v29.85,11.04 v31.02,12.4 | v32.35,20.4 30.73,34.45 arc-7 30.72,34.59 30.72,42.21 arc-6 30.73,42.35 31.48,48.98 arc6 31.48,49 31.48,49.12 U1.D12
  BOTTOM 0.254: v31.02,12.4 32.17,13.54 arc34 32.35,13.86 32.8,16.15 arc18 32.81,16.34 v32.35,20.4 | v20.4,8.49 22.35,9.92 arc-27 22.87,10.14 25.79,10.63 arc1 25.82,10.64 28.83,11.21 arc-23 29.09,11.21 v29.85,11.04
P1
  TOP 0.254: U1.D2 58.97,49.17 59.06,49.09 arc-8 59.08,49.07 60.37,47.33 arc-37 60.4,47.26 60.4,47.13 C3.2 60.94,46.6 61.07,46.6 61.52,46.6 61.65,46.6 C5.2
P2
  TOP 0.254: U1.D3 55.89,49.12 55.89,49 55.89,47.26 55.89,47.13 C4.2
PUMP_VCC
  TOP 0.254: R11.2 60.06,17.54 60.18,17.54 arc28 60.24,17.55 63.92,19.47 arc62 64.1,19.77 64.1,28.84 arc40 64.02,29.06 56.82,37.61 arc-19 56.77,37.7 55.66,40.59 arc16 55.57,40.74 54.49,42.19 arc-37 54.46,42.26 54.46,42.39 D1.AQ 53.77,44.32 53.77,44.45 53.77,49 53.77,49.12 U1.D4
SCI  (via drill 0.3 pad 0.61)
  TOP 0.152: 36,15.79 36.15,15.69 arc36 36.31,15.63 37.51,15.63 arc43 37.7,15.71 37.83,15.83
  TOP 0.254: 36,15.79 36,15.8 arc-11 35.98,15.86 35.57,18.1 arc-22 35.58,18.35 35.78,19.3 | 35.78,19.3 36.15,19.3 36.27,19.3 Q3.2 | 37.83,15.83 38.14,16.24 38.15,16.24 38.46,16.66 arc-39 38.64,16.78 41.68,17.59 arc-56 42.26,17.45 42.46,17.28 arc31 42.99,17.03 43.3,16.97 arc-20 43.51,16.9 43.51,16.9 arc15 43.59,16.86 44.96,16.51 arc-23 45.08,16.45 49.13,13.36 arc37 49.2,13.33 49.33,13.33 IC1.5 51.11,12.93 51.24,12.93 arc-11 51.26,12.93 v51.74,12.83 | 35.78,19.3 35.14,20.09 arc30 35,20.19 34.45,20.4 arc-60 34.06,20.9 U$2.P$7 | U$2.P$2 v18.05,31.92 | R26.1 11.7,5.76 11.83,5.76 12.34,5.76 arc18 12.54,5.79 v13.02,5.95
  BOTTOM 0.254: U$2.P$7 30.02,33.52 arc-28 29.44,33.36 26.9,33.31 arc-1 26.88,33.31 21.8,33.31 arc-30 21.15,33.49 U$2.P$2 | v18.05,31.92 13.5,21.85 arc-14 13.42,21.72 A3.3.PB3 12.75,9.15 arc-80 13.19,8.46 12.97,6.73 arc12 12.97,6.59 v13.02,5.95 | A2.3.PB3 v51.74,12.83
SDI_MOSI  (via drill 0.3 pad 0.61)
  TOP 0.254: v30.76,3.78 25.88,2.67 arc-11 25.64,2.64 18.01,2.46 18,2.46 17.88,2.46 Q4.2 17.11,2.47 17.11,2.59 arc41 17.08,2.68 v13.6,6.65 12.96,6.58 arc13 12.82,6.55 v12.34,6.4 11.83,6.4 11.7,6.4 R26.2 | U$2.P$21 23.12,34.79 arc16 23.11,34.46 24.02,26.34 arc-6 24.03,26.33 24.03,26.2 X1.4
  BOTTOM 0.254: A2.6.PB0 41.69,5.71 arc-28 41.13,5.56 38.45,5.51 arc12 38.32,5.49 v30.76,3.78 | U$2.P$12 42.76,35.7 arc14 42.48,35.82 26.39,40.54 arc-27 25.68,40.95 U$2.P$21 | X1.4 23.64,25.26 23.55,25.17 21.22,24.09 arc9 21.17,24.07 18.9,22.55 arc28 18.25,21.83 14.18,14.35 arc44 14.13,13.87 14.35,13.09 arc-23 14.37,12.84 v13.6,6.65 | v12.34,6.4 A3.6.PB0
SDO-SCK  (via drill 0.3 pad 0.61)
  TOP 0.254: U$2.P$23 20.47,34.79 arc-1 20.48,34.77 20.53,34.41 arc8 20.57,34.24 23.14,25.17 arc9 23.15,25.13 23.78,23.74 arc19 23.81,23.7 23.9,23.61 X1.3 24.77,22.71 24.86,22.62 | v15.28,10.8 14.64,10.11 arc-33 14.48,10.01 13.11,9.65 arc19 13.01,9.61 12.2,9.07 arc23 12.02,8.89 11.72,8.43 arc33 11.7,8.36 11.7,8.23 R26.4 11.3,8.23 11.3,8.36 arc70 11.22,8.48 10.69,8.67 arc20 10.58,8.69 9.93,8.69 arc42 9.7,8.61 9.46,8.38 arc11 9.36,8.28 8.91,7.68 arc26 8.79,7.41 8.21,4.35 8.21,4.22 Q7.2 7.83,4.22 7.7,4.22 arc-64 7.59,4.3 6.34,6.9 arc2 6.33,6.94 A3.4.PB2 | v51.65,15.04 51.33,15.42 arc50 51.24,15.47 51.11,15.47 IC1.3 49.33,15.87 49.2,15.87 arc-39 49.12,15.9 v45.39,18.95 | v28.52,20.49 27.43,20.95 arc-6 27.37,20.98 27.02,21.18 arc10 26.39,21.46 26.18,21.53 arc-22 25.91,21.69 24.87,22.62 24.86,22.62 | 24.86,22.62
  BOTTOM 0.254: A2.4.PB2 v51.65,15.04 | v45.39,18.95 34.84,21.61 arc24 34.58,21.62 29.19,20.68 arc6 29.12,20.66 v28.52,20.49 | U$2.P$14 40.22,43.32 arc29 39.61,43.49 24.38,43.9 arc12 24.03,43.88 21.57,43.43 arc19 21.2,43.29 U$2.P$23 | X1.3 23.64,22.72 23.55,22.63 arc-21 23.51,22.61 22.12,21.98 arc-24 21.98,21.95 21.38,21.95 21.35,21.95 arc-29 21.19,21.99 20.79,22.22 arc102 18.53,21.33 v15.28,10.8
SII-MISO  (via drill 0.3 pad 0.61)
  TOP 0.254: v18.05,6.02 17.88,6.49 arc-20 17.88,6.53 17.88,6.66 Q5.2 17.11,7.04 16.99,7.04 16.98,7.04 13.65,7.28 arc8 13.56,7.28 v12.35,7.21 11.83,7.21 11.7,7.21 R26.3 | U$2.P$13 50.84,19.22 arc-15 50.86,19.05 50.86,18.54 50.86,18.41 IC1.1 49.33,18.01 49.2,18.01 arc62 49.09,17.94 v48.7,17.21
  BOTTOM 0.254: 44.93,8.46 40.96,7.99 arc28 40.41,7.79 38.41,6.42 arc-30 37.43,6.07 25.69,5.23 arc-3 25.63,5.23 23.09,5.18 arc-11 22.86,5.2 v18.05,6.02 | A2.5.PB1 44.93,8.46 | v12.35,7.21 9.54,6.67 arc-7 9.46,6.66 A3.5.PB1 | U$2.P$22 23.74,43.29 arc-111 25.56,42.39 25.61,42.03 arc82 26.88,40.93 39.58,40.93 arc1 39.6,40.93 42.14,40.98 arc28 42.72,41.14 U$2.P$13 | v48.7,17.21 44.93,8.46
VCC
  TOP 0.254: U1.5V 37.96,2.23 37.87,2.32 32.23,8.33 arc47 32.14,8.37 32.01,8.37 R4.8 31.76,8.57 31.64,8.57 31.34,8.57 31.21,8.57 R4.7 30.96,8.57 30.84,8.57 30.54,8.57 30.41,8.57 R4.6 30.16,8.57 30.04,8.57 29.74,8.57 29.61,8.57 R4.5 29.36,8.77 29.24,8.77 arc-58 29.13,8.83 28.57,9.72 arc-16 28.48,9.93 28.34,10.41 arc-13 28.32,10.55 28.06,15.52 arc-15 28.1,16.03 28.1,16.04 arc20 28.13,16.94 27.9,18.44 arc56 27.04,19.61 26.81,19.72 arc-4 26.69,19.78 26.34,19.98 arc20 25.52,20.26 24.33,20.46 arc46 22.8,20.08 21.69,19.25 arc-64 20.05,19.11 19.31,19.49 arc-32 18.69,20.06 12.71,29.92 arc2 12.69,29.96 5.01,41.5 arc-34 4.99,41.57 4.99,41.7 SW4.O
VCC_OFF  (via drill 0.3 pad 0.61)
  TOP 0.254: v39.39,26.33 40.83,34.37 arc10 40.85,34.59 40.85,34.6 40.89,42.22 arc-6 40.89,42.35 41.64,48.98 arc6 41.64,49 41.64,49.12 U1.D8 | Q2.1 15.06,17.05 15.19,17.05 20.79,17.1 arc31 22.51,17.59 23.52,18.2 arc-2 23.55,18.21 v24.01,18.47
  BOTTOM 0.254: v24.01,18.47 27.21,21.97 arc-38 27.57,22.16 37.62,23.88 arc70 39.24,25.48 v39.39,26.33

## Text on the board
tNames: https://github.com/telavivmakers/High-Voltage-ATtiny-ATTami-Fuse-Reset
tDocu: HV | isp | 5V | 3V3
Name: HV | ISP | |&lt;8 pin&gt;| | |&lt;--14 pin--&gt;| | ATtiny | 5V | 3.3V | TAMI ATtiny / HV / ISP / Programmer | |&lt;8 pin&gt;| | |&lt;--14 pin--&gt;| | ATtiny | PB0 | PB1 | PB2 | PB3 | PB4 | PB5 | test | load | ISP | ATTami | HV | H.B. | prog | ERR | ATTami